# Altium PCB Front.PcbDoc
Units mm, origin at the board's own origin, x right, y up, seen from the top; angles counter-clockwise.
Board outline 72.04 x 19.15 mm, 2 copper layers (Top Layer, Bottom Layer), stack 1.071 mm thick; 3 components, 1 nets, 6 pads, 0 vias.
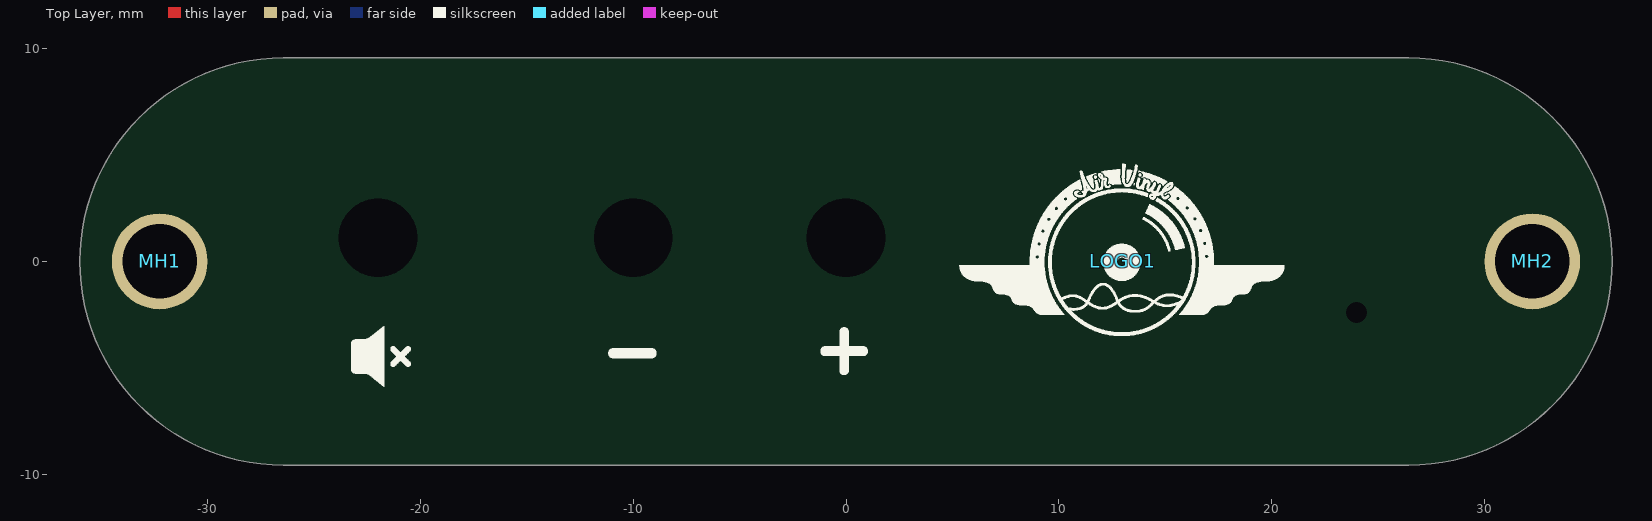
[diagram p0: Top Layer view]
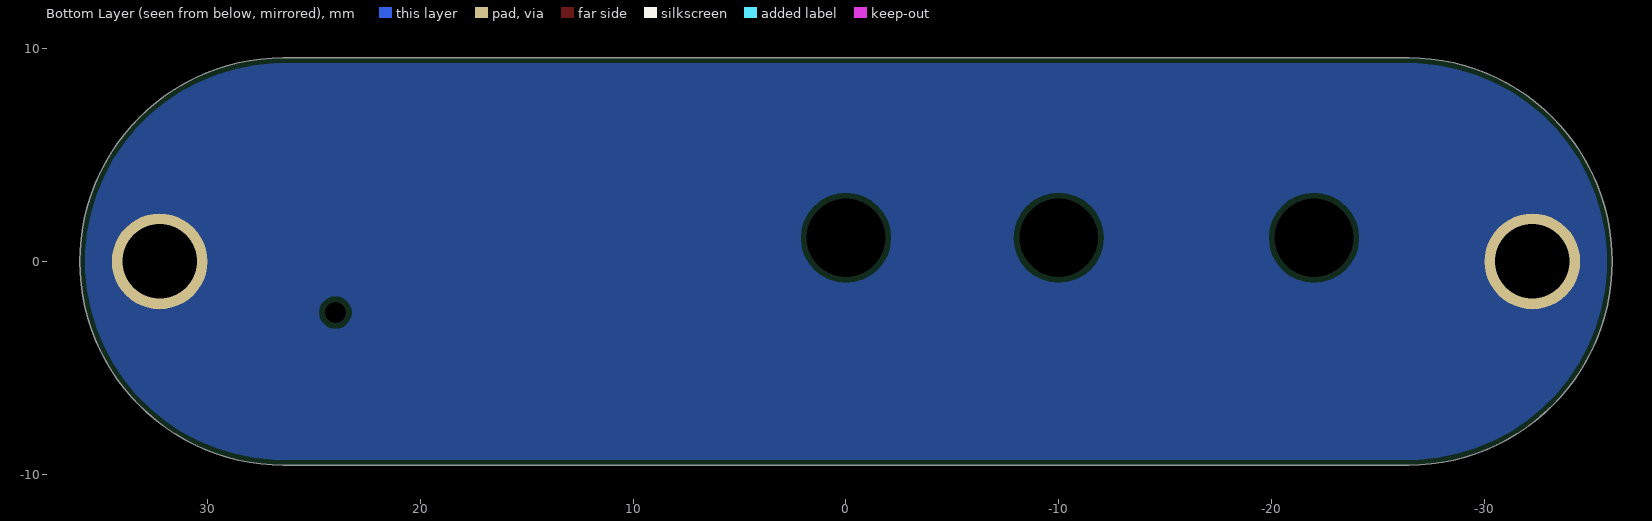
[diagram p1: Bottom Layer view, seen from below]

## Layer stack, top to bottom
Top Solder: solder mask 0.0102, Solder Resist, Dk 3.5
Top Layer: signal copper 0.0356
Dielectric 1: dielectric 1, FR-4, Dk 4.8
Bottom Layer: signal copper 0.0356
Bottom Solder: solder mask 0.0102, Solder Resist, Dk 3.5

## Board outline
-26.445,-9.575 26.445,-9.575 ccw(c26.445,0) 26.445,9.575 -26.445,9.575 ccw(c-26.445,0)

## Design rules (kind name [scope] priority, off if disabled: settings)
BoardOutlineClearance [All] p1: gap=0.254 ignorepadtopadclearanceinfootprint=FALSE except(0: Arc-SplitContinuation Track-SplitContinuation SMDPad-SplitContinuation THPad-SplitContinuation Via-SplitContinuation Fill-SplitContinuation Poly-SplitContinuation Region-SplitContinuation Text-SplitContinuation)
Clearance [All] p1: gap=0.254 ignorepadtopadclearanceinfootprint=FALSE except(0: Arc-Hole Track-Hole SMDPad-Hole THPad-Hole Via-Hole Fill-Hole Poly-Hole Region-Hole Text-Hole)
PolygonConnect [All] p1: connectstyle=Direct reliefconductorwidth=0.254 reliefentries=4 polygonreliefangle="90 Angle" airgapwidth=0.254
RoutingVias [All] p1: holewidth=0.711 width=1.27 viastyle="Through Hole" minholewidth=0.711 minwidth=1.27 maxholewidth=0.711 maxwidth=1.27
SolderMaskExpansion [All] p1: expansion=0.102
Width [All] p1: maxlimit=0.254 minlimit=0.254 preferedwidth=0.254
30 further rules are at their usual default settings.

## Components (designator, comment, footprint, x,y, rotation, side; value= is the part's Value field where it differs from the comment)
LOGO1 "Air Vinyl" LOGO-AIR-Vinyl 13,0 r0 top
MH1 "Mounting hole" MECH_MHOLE_3.5-GND-2 -32.265,0 r0 top
MH2 "Mounting hole" MECH_MHOLE_3.5-GND-2 32.265,0 r0 top

## Footprints (in the part's own frame and the unit in brackets; to place one, negate y for a bottom-side part, rotate by r counter-clockwise, add the part's x,y. Pads: shape width x height; smd on the part's side, far side on the other; paste and mask are expansions set on the pad)
LOGO-AIR-Vinyl [mm]
  silkscreen extent -7.68,-3.48 7.61,4.59
MECH_MHOLE_3.5-GND-2 [mm] "Mounting hole 3.5mm"
  round 4.5 hole 3.5 mask+0: 1(0,0)
  body extent -2,-2 2,2, height 1.61

## Part data
LOGO1: library part LOGO-AirVinyl, "LOGO AIR Vinyl"
MH1 MH2: library part MECH_MHOLE_NET

## Free pads (board coordinates)
  rect 1.8x1.05 hole 3.7 unplated: 0(-22,1.11) 0(-10,1.11) 0(0,1.11)
  rect 0.1x0.1 hole 1 unplated: 0(24,-2.4)

## Nets (pads, with @x,y where several pads share a name; then routed paths per layer and width w, separated by ;. In a path a pad name is that pad's centre, name@x,y a point inside that pad or via, vN(x,y) a via of type N, cw(c..) or ccw(c..) an arc to the next point about the centre after c; other vN are vias at no path point)
GND: MH1.1 MH2.1

## Polygon pours and split planes (outlines as drawn)
no net on Top Layer "Top Layer-No Net" (solid, pour order 2): 12,-20
GND on Bottom Layer "GND_L02_P006" (solid, pour order 6): -37,10 -37,-10 37,-10 37,10

## Silkscreen, mask and mechanical layers (free items; w line width, h text height)
Top Overlay:
  drawing of 1022 lines, arcs and shapes, not listed
Mechanical 1:
  the board outline again, w0.2